# EAGLE board Enlighten-PL9823-Panel-1 (EAGLE 7.5.0)
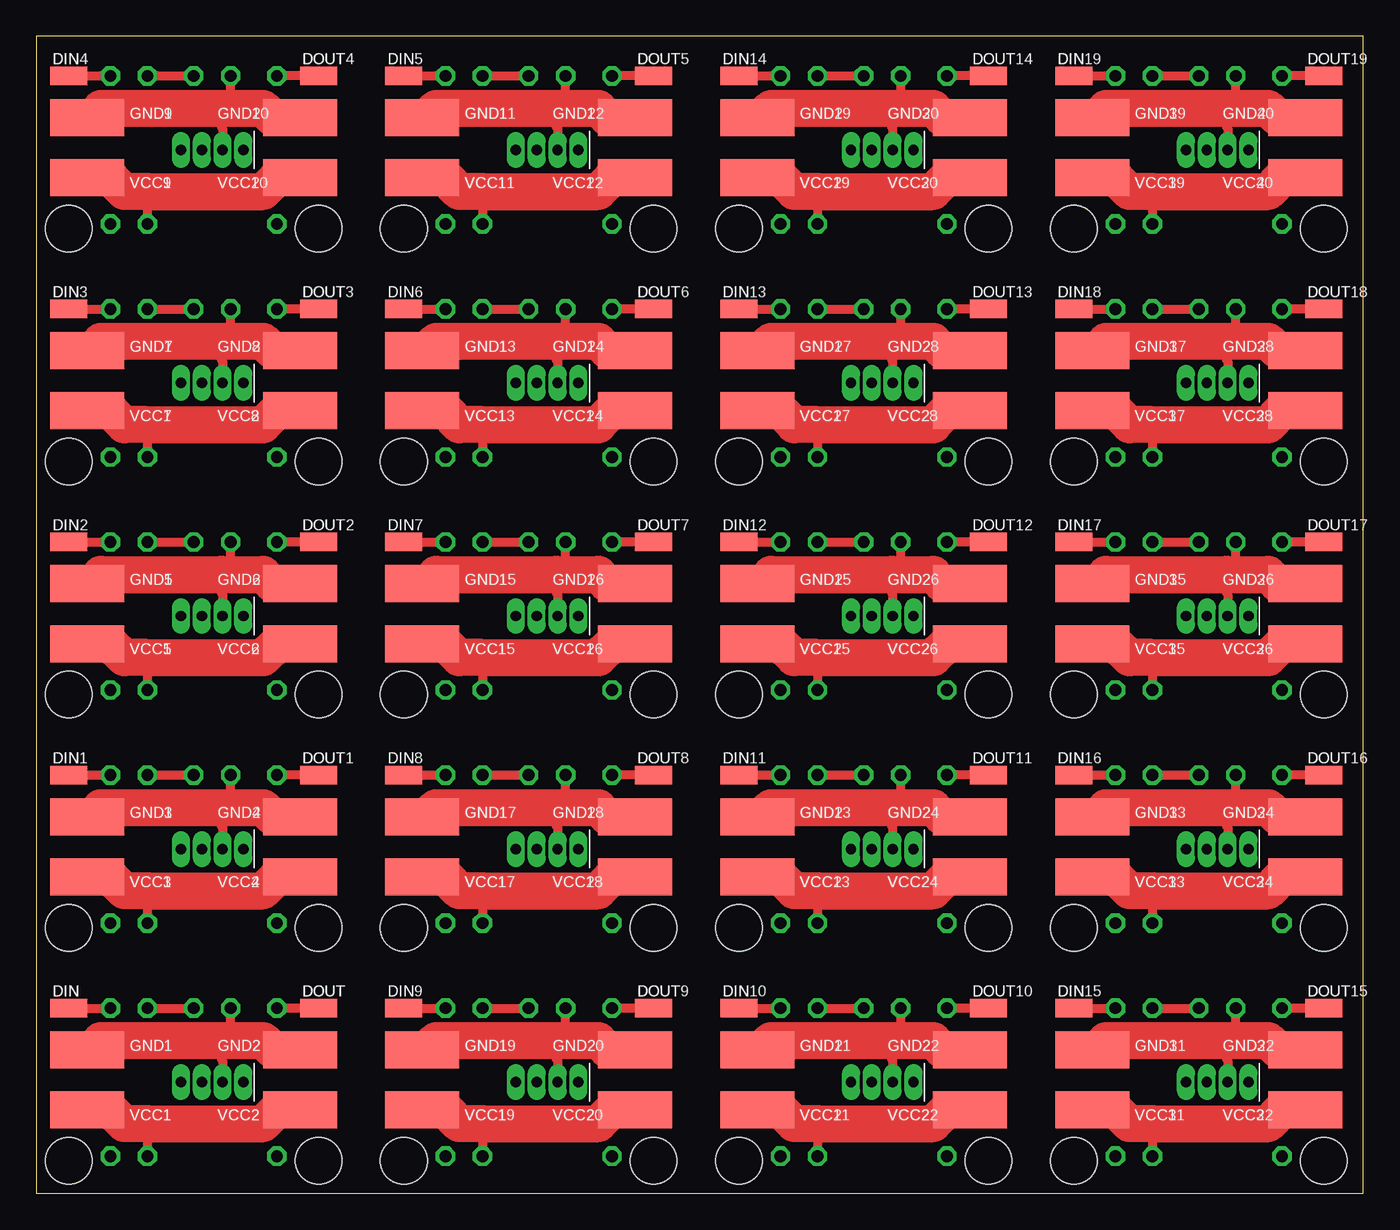
[diagram p0: board, top side]
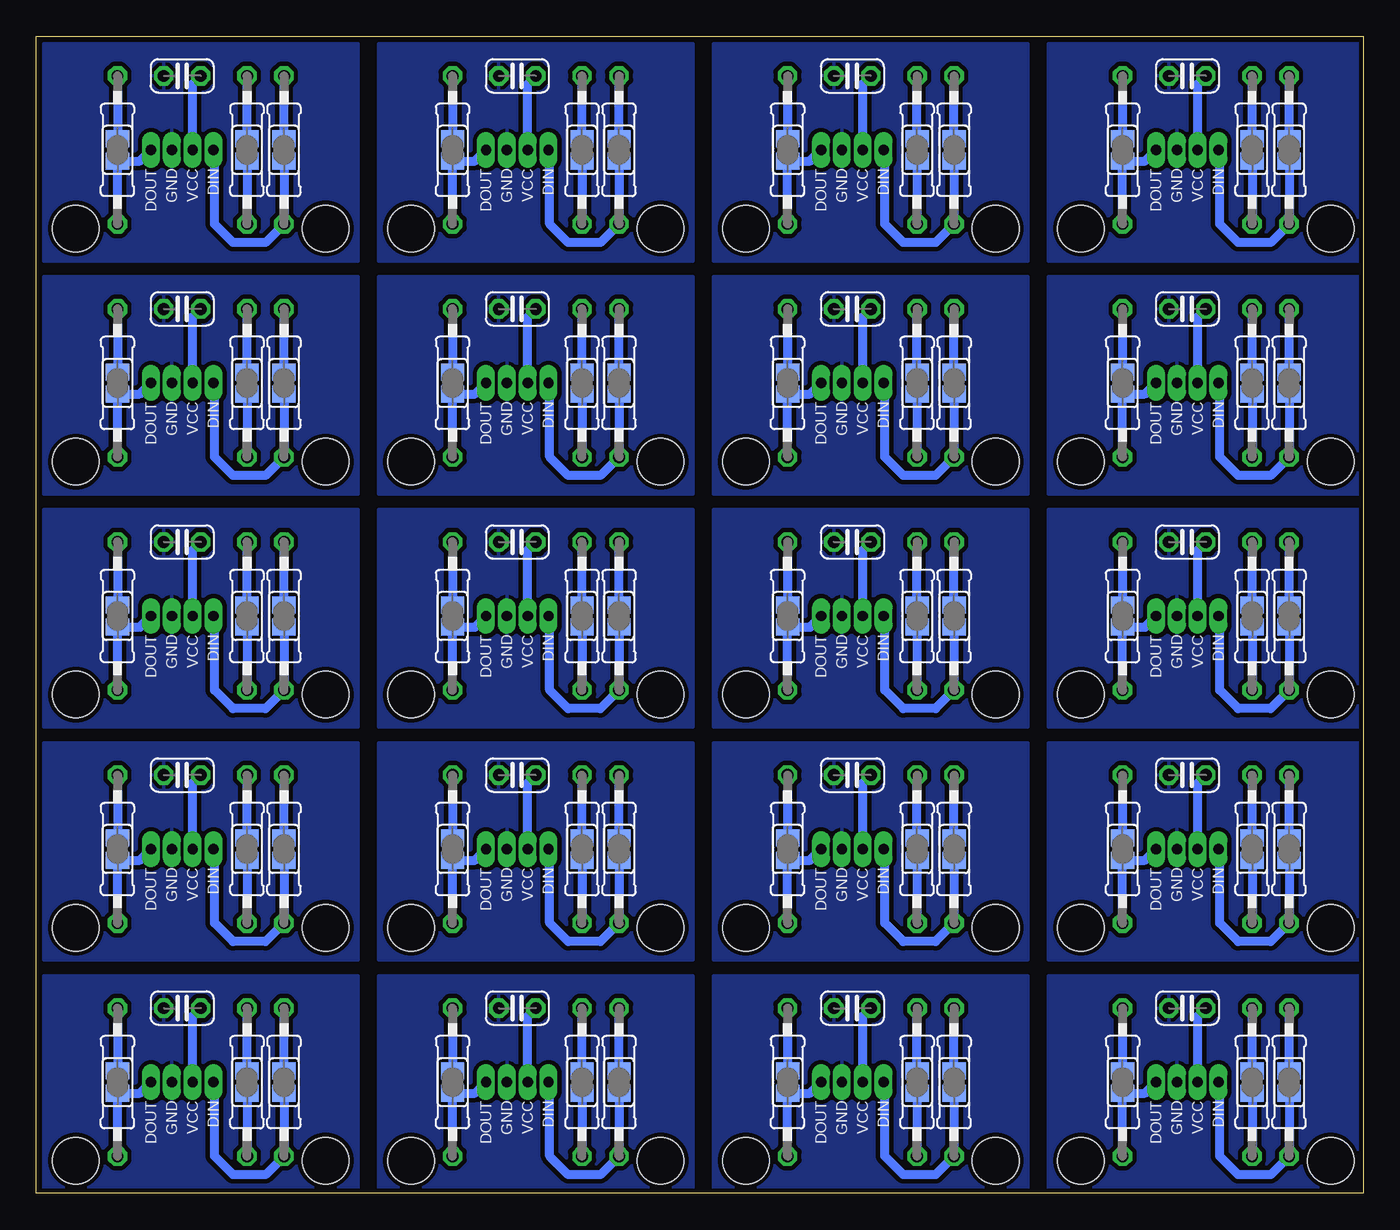
[diagram p1: board, bottom side, seen from below]

Size 91.08 x 79.41 mm. Coordinates in mm from the lower left corner, seen from the top.
Outline: 0,0 91.08,0 91.08,79.41 0,79.41 0,0
Copper layers (1*16): Top 0.035mm / dielectric 1.5mm / Bottom 0.035mm
Design rules "dirt_cheap_dirty_boards.v1": minimum track width 5mil, minimum drill 12mil, track to track 5mil, track to pad 5mil, pad to pad 5mil, via to via 5mil, smd to smd 0mil, copper to edge 10mil, drill to drill 10mil, minimum pad ring 10mil, minimum via ring 6mil, stop-mask expansion 2mil, vias tented up to drill 25mil, thermal gap 10mil
Holes 3.2 mm at 2.22,2.22 19.37,2.22 2.22,18.22 19.37,18.22 2.22,34.22 19.37,34.22 2.22,50.22 19.37,50.22 2.22,66.22 19.37,66.22 25.22,66.22 42.37,66.22 25.22,50.22 42.37,50.22 25.22,34.22 42.37,34.22 25.22,18.22 42.37,18.22 25.22,2.22 42.37,2.22 48.22,2.22 65.37,2.22 48.22,18.22 65.37,18.22 48.22,34.22 65.37,34.22 48.22,50.22 65.37,50.22 48.22,66.22 65.37,66.22 71.22,2.22 88.37,2.22 71.22,18.22 88.37,18.22 71.22,34.22 88.37,34.22 71.22,50.22 88.37,50.22 71.22,66.22 88.37,66.22

## Footprints (pad centres in the part's own frame; a part is rotated, then mirrored left to right if it is on the bottom)
C025-024X044 = drill 0.813 octagon: 1 -1.27,0; 2 1.27,0
SMD1,27-2,54 = smd 1.27 x 2.54: 1 0,0
SMD2,54-5,08 = smd 2.54 x 5.08: 1 0,0
LED-PL9823-F5W = drill 0.711 pad 0.889 long: 1 -2.143,0; 2 -0.714,0; 3 0.714,0; 4 2.143,0
0207/10 = drill 0.813 octagon: 1 -5.08,0; 2 5.08,0
SJ = smd 1.168 x 1.6: 1 -0.762,0; 2 0.762,0

## Placement (x,y rotation side)
C1  100nF  [C025-024X044]  12.06,12.7 180 bottom
C2  100nF  [C025-024X044]  12.06,28.7 180 bottom
C3  100nF  [C025-024X044]  12.06,44.7 180 bottom
C4  100nF  [C025-024X044]  12.06,60.7 180 bottom
C5  100nF  [C025-024X044]  12.06,76.7 180 bottom
C6  100nF  [C025-024X044]  35.06,76.7 180 bottom
C7  100nF  [C025-024X044]  35.06,60.7 180 bottom
C8  100nF  [C025-024X044]  35.06,44.7 180 bottom
C9  100nF  [C025-024X044]  35.06,28.7 180 bottom
C10  100nF  [C025-024X044]  35.06,12.7 180 bottom
C11  100nF  [C025-024X044]  58.06,12.7 180 bottom
C12  100nF  [C025-024X044]  58.06,28.7 180 bottom
C13  100nF  [C025-024X044]  58.06,44.7 180 bottom
C14  100nF  [C025-024X044]  58.06,60.7 180 bottom
C15  100nF  [C025-024X044]  58.06,76.7 180 bottom
C16  100nF  [C025-024X044]  81.06,12.7 180 bottom
C17  100nF  [C025-024X044]  81.06,28.7 180 bottom
C18  100nF  [C025-024X044]  81.06,44.7 180 bottom
C19  100nF  [C025-024X044]  81.06,60.7 180 bottom
C20  100nF  [C025-024X044]  81.06,76.7 180 bottom
DIN  [SMD1,27-2,54]  2.22,12.7 90 top
DIN1  [SMD1,27-2,54]  2.22,28.7 90 top
DIN2  [SMD1,27-2,54]  2.22,44.7 90 top
DIN3  [SMD1,27-2,54]  2.22,60.7 90 top
DIN4  [SMD1,27-2,54]  2.22,76.7 90 top
DIN5  [SMD1,27-2,54]  25.22,76.7 90 top
DIN6  [SMD1,27-2,54]  25.22,60.7 90 top
DIN7  [SMD1,27-2,54]  25.22,44.7 90 top
DIN8  [SMD1,27-2,54]  25.22,28.7 90 top
DIN9  [SMD1,27-2,54]  25.22,12.7 90 top
DIN10  [SMD1,27-2,54]  48.22,12.7 90 top
DIN11  [SMD1,27-2,54]  48.22,28.7 90 top
DIN12  [SMD1,27-2,54]  48.22,44.7 90 top
DIN13  [SMD1,27-2,54]  48.22,60.7 90 top
DIN14  [SMD1,27-2,54]  48.22,76.7 90 top
DIN15  [SMD1,27-2,54]  71.22,12.7 90 top
DIN16  [SMD1,27-2,54]  71.22,28.7 90 top
DIN17  [SMD1,27-2,54]  71.22,44.7 90 top
DIN18  [SMD1,27-2,54]  71.22,60.7 90 top
DIN19  [SMD1,27-2,54]  71.22,76.7 90 top
DOUT  [SMD1,27-2,54]  19.37,12.7 90 top
DOUT1  [SMD1,27-2,54]  19.37,28.7 90 top
DOUT2  [SMD1,27-2,54]  19.37,44.7 90 top
DOUT3  [SMD1,27-2,54]  19.37,60.7 90 top
DOUT4  [SMD1,27-2,54]  19.37,76.7 90 top
DOUT5  [SMD1,27-2,54]  42.37,76.7 90 top
DOUT6  [SMD1,27-2,54]  42.37,60.7 90 top
DOUT7  [SMD1,27-2,54]  42.37,44.7 90 top
DOUT8  [SMD1,27-2,54]  42.37,28.7 90 top
DOUT9  [SMD1,27-2,54]  42.37,12.7 90 top
DOUT10  [SMD1,27-2,54]  65.37,12.7 90 top
DOUT11  [SMD1,27-2,54]  65.37,28.7 90 top
DOUT12  [SMD1,27-2,54]  65.37,44.7 90 top
DOUT13  [SMD1,27-2,54]  65.37,60.7 90 top
DOUT14  [SMD1,27-2,54]  65.37,76.7 90 top
DOUT15  [SMD1,27-2,54]  88.37,12.7 90 top
DOUT16  [SMD1,27-2,54]  88.37,28.7 90 top
DOUT17  [SMD1,27-2,54]  88.37,44.7 90 top
DOUT18  [SMD1,27-2,54]  88.37,60.7 90 top
DOUT19  [SMD1,27-2,54]  88.37,76.7 90 top
GND1  [SMD2,54-5,08]  3.49,9.84 90 top
GND2  [SMD2,54-5,08]  18.1,9.84 90 top
GND3  [SMD2,54-5,08]  3.49,25.84 90 top
GND4  [SMD2,54-5,08]  18.1,25.84 90 top
GND5  [SMD2,54-5,08]  3.49,41.84 90 top
GND6  [SMD2,54-5,08]  18.1,41.84 90 top
GND7  [SMD2,54-5,08]  3.49,57.84 90 top
GND8  [SMD2,54-5,08]  18.1,57.84 90 top
GND9  [SMD2,54-5,08]  3.49,73.84 90 top
GND10  [SMD2,54-5,08]  18.1,73.84 90 top
GND11  [SMD2,54-5,08]  26.49,73.84 90 top
GND12  [SMD2,54-5,08]  41.1,73.84 90 top
GND13  [SMD2,54-5,08]  26.49,57.84 90 top
GND14  [SMD2,54-5,08]  41.1,57.84 90 top
GND15  [SMD2,54-5,08]  26.49,41.84 90 top
GND16  [SMD2,54-5,08]  41.1,41.84 90 top
GND17  [SMD2,54-5,08]  26.49,25.84 90 top
GND18  [SMD2,54-5,08]  41.1,25.84 90 top
GND19  [SMD2,54-5,08]  26.49,9.84 90 top
GND20  [SMD2,54-5,08]  41.1,9.84 90 top
GND21  [SMD2,54-5,08]  49.49,9.84 90 top
GND22  [SMD2,54-5,08]  64.1,9.84 90 top
GND23  [SMD2,54-5,08]  49.49,25.84 90 top
GND24  [SMD2,54-5,08]  64.1,25.84 90 top
GND25  [SMD2,54-5,08]  49.49,41.84 90 top
GND26  [SMD2,54-5,08]  64.1,41.84 90 top
GND27  [SMD2,54-5,08]  49.49,57.84 90 top
GND28  [SMD2,54-5,08]  64.1,57.84 90 top
GND29  [SMD2,54-5,08]  49.49,73.84 90 top
GND30  [SMD2,54-5,08]  64.1,73.84 90 top
GND31  [SMD2,54-5,08]  72.49,9.84 90 top
GND32  [SMD2,54-5,08]  87.1,9.84 90 top
GND33  [SMD2,54-5,08]  72.49,25.84 90 top
GND34  [SMD2,54-5,08]  87.1,25.84 90 top
GND35  [SMD2,54-5,08]  72.49,41.84 90 top
GND36  [SMD2,54-5,08]  87.1,41.84 90 top
GND37  [SMD2,54-5,08]  72.49,57.84 90 top
GND38  [SMD2,54-5,08]  87.1,57.84 90 top
GND39  [SMD2,54-5,08]  72.49,73.84 90 top
GND40  [SMD2,54-5,08]  87.1,73.84 90 top
PLC1  LED-PL9823-F5W  [LED-PL9823-F5W]  12.06,23.62 0 top
PLC2  LED-PL9823-F5W  [LED-PL9823-F5W]  12.06,39.62 0 top
PLC3  LED-PL9823-F5W  [LED-PL9823-F5W]  12.06,55.62 0 top
PLC4  LED-PL9823-F5W  [LED-PL9823-F5W]  12.06,71.62 0 top
PLC5  LED-PL9823-F5W  [LED-PL9823-F5W]  35.06,71.62 0 top
PLC6  LED-PL9823-F5W  [LED-PL9823-F5W]  35.06,55.62 0 top
PLC7  LED-PL9823-F5W  [LED-PL9823-F5W]  35.06,39.62 0 top
PLC8  LED-PL9823-F5W  [LED-PL9823-F5W]  35.06,23.62 0 top
PLC9  LED-PL9823-F5W  [LED-PL9823-F5W]  35.06,7.62 0 top
PLC10  LED-PL9823-F5W  [LED-PL9823-F5W]  58.06,7.62 0 top
PLC11  LED-PL9823-F5W  [LED-PL9823-F5W]  58.06,23.62 0 top
PLC12  LED-PL9823-F5W  [LED-PL9823-F5W]  58.06,39.62 0 top
PLC13  LED-PL9823-F5W  [LED-PL9823-F5W]  58.06,55.62 0 top
PLC14  LED-PL9823-F5W  [LED-PL9823-F5W]  58.06,71.62 0 top
PLC15  LED-PL9823-F5W  [LED-PL9823-F5W]  81.06,7.62 0 top
PLC16  LED-PL9823-F5W  [LED-PL9823-F5W]  81.06,23.62 0 top
PLC17  LED-PL9823-F5W  [LED-PL9823-F5W]  81.06,39.62 0 top
PLC18  LED-PL9823-F5W  [LED-PL9823-F5W]  81.06,55.62 0 top
PLC19  LED-PL9823-F5W  [LED-PL9823-F5W]  81.06,71.62 0 top
PLC9823  LED-PL9823-F5W  [LED-PL9823-F5W]  12.06,7.62 0 top
R1  33R  [0207/10]  5.08,7.62 90 bottom
R2  33R  [0207/10]  16.51,7.62 90 bottom
R3  150R  [0207/10]  7.62,7.62 90 bottom
R4  33R  [0207/10]  5.08,23.62 90 bottom
R5  33R  [0207/10]  16.51,23.62 90 bottom
R6  150R  [0207/10]  7.62,23.62 90 bottom
R7  33R  [0207/10]  5.08,39.62 90 bottom
R8  33R  [0207/10]  16.51,39.62 90 bottom
R9  150R  [0207/10]  7.62,39.62 90 bottom
R10  33R  [0207/10]  5.08,55.62 90 bottom
R11  33R  [0207/10]  16.51,55.62 90 bottom
R12  150R  [0207/10]  7.62,55.62 90 bottom
R13  33R  [0207/10]  5.08,71.62 90 bottom
R14  33R  [0207/10]  16.51,71.62 90 bottom
R15  150R  [0207/10]  7.62,71.62 90 bottom
R16  33R  [0207/10]  28.08,71.62 90 bottom
R17  33R  [0207/10]  39.51,71.62 90 bottom
R18  150R  [0207/10]  30.62,71.62 90 bottom
R19  33R  [0207/10]  28.08,55.62 90 bottom
R20  33R  [0207/10]  39.51,55.62 90 bottom
R21  150R  [0207/10]  30.62,55.62 90 bottom
R22  33R  [0207/10]  28.08,39.62 90 bottom
R23  33R  [0207/10]  39.51,39.62 90 bottom
R24  150R  [0207/10]  30.62,39.62 90 bottom
R25  33R  [0207/10]  28.08,23.62 90 bottom
R26  33R  [0207/10]  39.51,23.62 90 bottom
R27  150R  [0207/10]  30.62,23.62 90 bottom
R28  33R  [0207/10]  28.08,7.62 90 bottom
R29  33R  [0207/10]  39.51,7.62 90 bottom
R30  150R  [0207/10]  30.62,7.62 90 bottom
R31  33R  [0207/10]  51.08,7.62 90 bottom
R32  33R  [0207/10]  62.51,7.62 90 bottom
R33  150R  [0207/10]  53.62,7.62 90 bottom
R34  33R  [0207/10]  51.08,23.62 90 bottom
R35  33R  [0207/10]  62.51,23.62 90 bottom
R36  150R  [0207/10]  53.62,23.62 90 bottom
R37  33R  [0207/10]  51.08,39.62 90 bottom
R38  33R  [0207/10]  62.51,39.62 90 bottom
R39  150R  [0207/10]  53.62,39.62 90 bottom
R40  33R  [0207/10]  51.08,55.62 90 bottom
R41  33R  [0207/10]  62.51,55.62 90 bottom
R42  150R  [0207/10]  53.62,55.62 90 bottom
R43  33R  [0207/10]  51.08,71.62 90 bottom
R44  33R  [0207/10]  62.51,71.62 90 bottom
R45  150R  [0207/10]  53.62,71.62 90 bottom
R46  33R  [0207/10]  74.08,7.62 90 bottom
R47  33R  [0207/10]  85.51,7.62 90 bottom
R48  150R  [0207/10]  76.62,7.62 90 bottom
R49  33R  [0207/10]  74.08,23.62 90 bottom
R50  33R  [0207/10]  85.51,23.62 90 bottom
R51  150R  [0207/10]  76.62,23.62 90 bottom
R52  33R  [0207/10]  74.08,39.62 90 bottom
R53  33R  [0207/10]  85.51,39.62 90 bottom
R54  150R  [0207/10]  76.62,39.62 90 bottom
R55  33R  [0207/10]  74.08,55.62 90 bottom
R56  33R  [0207/10]  85.51,55.62 90 bottom
R57  150R  [0207/10]  76.62,55.62 90 bottom
R58  33R  [0207/10]  74.08,71.62 90 bottom
R59  33R  [0207/10]  85.51,71.62 90 bottom
R60  150R  [0207/10]  76.62,71.62 90 bottom
SJ1  [SJ]  5.08,7.62 90 bottom
SJ2  [SJ]  16.51,7.62 90 bottom
SJ3  [SJ]  7.62,7.62 90 bottom
SJ4  [SJ]  5.08,23.62 90 bottom
SJ5  [SJ]  16.51,23.62 90 bottom
SJ6  [SJ]  7.62,23.62 90 bottom
SJ7  [SJ]  5.08,39.62 90 bottom
SJ8  [SJ]  16.51,39.62 90 bottom
SJ9  [SJ]  7.62,39.62 90 bottom
SJ10  [SJ]  5.08,55.62 90 bottom
SJ11  [SJ]  16.51,55.62 90 bottom
SJ12  [SJ]  7.62,55.62 90 bottom
SJ13  [SJ]  5.08,71.62 90 bottom
SJ14  [SJ]  16.51,71.62 90 bottom
SJ15  [SJ]  7.62,71.62 90 bottom
SJ16  [SJ]  28.08,71.62 90 bottom
SJ17  [SJ]  39.51,71.62 90 bottom
SJ18  [SJ]  30.62,71.62 90 bottom
SJ19  [SJ]  28.08,55.62 90 bottom
SJ20  [SJ]  39.51,55.62 90 bottom
SJ21  [SJ]  30.62,55.62 90 bottom
SJ22  [SJ]  28.08,39.62 90 bottom
SJ23  [SJ]  39.51,39.62 90 bottom
SJ24  [SJ]  30.62,39.62 90 bottom
SJ25  [SJ]  28.08,23.62 90 bottom
SJ26  [SJ]  39.51,23.62 90 bottom
SJ27  [SJ]  30.62,23.62 90 bottom
SJ28  [SJ]  28.08,7.62 90 bottom
SJ29  [SJ]  39.51,7.62 90 bottom
SJ30  [SJ]  30.62,7.62 90 bottom
SJ31  [SJ]  51.08,7.62 90 bottom
SJ32  [SJ]  62.51,7.62 90 bottom
SJ33  [SJ]  53.62,7.62 90 bottom
SJ34  [SJ]  51.08,23.62 90 bottom
SJ35  [SJ]  62.51,23.62 90 bottom
SJ36  [SJ]  53.62,23.62 90 bottom
SJ37  [SJ]  51.08,39.62 90 bottom
SJ38  [SJ]  62.51,39.62 90 bottom
SJ39  [SJ]  53.62,39.62 90 bottom
SJ40  [SJ]  51.08,55.62 90 bottom
SJ41  [SJ]  62.51,55.62 90 bottom
SJ42  [SJ]  53.62,55.62 90 bottom
SJ43  [SJ]  51.08,71.62 90 bottom
SJ44  [SJ]  62.51,71.62 90 bottom
SJ45  [SJ]  53.62,71.62 90 bottom
SJ46  [SJ]  74.08,7.62 90 bottom
SJ47  [SJ]  85.51,7.62 90 bottom
SJ48  [SJ]  76.62,7.62 90 bottom
SJ49  [SJ]  74.08,23.62 90 bottom
SJ50  [SJ]  85.51,23.62 90 bottom
SJ51  [SJ]  76.62,23.62 90 bottom
SJ52  [SJ]  74.08,39.62 90 bottom
SJ53  [SJ]  85.51,39.62 90 bottom
SJ54  [SJ]  76.62,39.62 90 bottom
SJ55  [SJ]  74.08,55.62 90 bottom
SJ56  [SJ]  85.51,55.62 90 bottom
SJ57  [SJ]  76.62,55.62 90 bottom
SJ58  [SJ]  74.08,71.62 90 bottom
SJ59  [SJ]  85.51,71.62 90 bottom
SJ60  [SJ]  76.62,71.62 90 bottom
VCC1  [SMD2,54-5,08]  3.49,5.71 90 top
VCC2  [SMD2,54-5,08]  18.1,5.71 90 top
VCC3  [SMD2,54-5,08]  3.49,21.71 90 top
VCC4  [SMD2,54-5,08]  18.1,21.71 90 top
VCC5  [SMD2,54-5,08]  3.49,37.72 90 top
VCC6  [SMD2,54-5,08]  18.1,37.72 90 top
VCC7  [SMD2,54-5,08]  3.49,53.72 90 top
VCC8  [SMD2,54-5,08]  18.1,53.72 90 top
VCC9  [SMD2,54-5,08]  3.49,69.72 90 top
VCC10  [SMD2,54-5,08]  18.1,69.72 90 top
VCC11  [SMD2,54-5,08]  26.49,69.72 90 top
VCC12  [SMD2,54-5,08]  41.1,69.72 90 top
VCC13  [SMD2,54-5,08]  26.49,53.72 90 top
VCC14  [SMD2,54-5,08]  41.1,53.72 90 top
VCC15  [SMD2,54-5,08]  26.49,37.72 90 top
VCC16  [SMD2,54-5,08]  41.1,37.72 90 top
VCC17  [SMD2,54-5,08]  26.49,21.71 90 top
VCC18  [SMD2,54-5,08]  41.1,21.71 90 top
VCC19  [SMD2,54-5,08]  26.49,5.71 90 top
VCC20  [SMD2,54-5,08]  41.1,5.71 90 top
VCC21  [SMD2,54-5,08]  49.49,5.71 90 top
VCC22  [SMD2,54-5,08]  64.1,5.71 90 top
VCC23  [SMD2,54-5,08]  49.49,21.71 90 top
VCC24  [SMD2,54-5,08]  64.1,21.71 90 top
VCC25  [SMD2,54-5,08]  49.49,37.72 90 top
VCC26  [SMD2,54-5,08]  64.1,37.72 90 top
VCC27  [SMD2,54-5,08]  49.49,53.72 90 top
VCC28  [SMD2,54-5,08]  64.1,53.72 90 top
VCC29  [SMD2,54-5,08]  49.49,69.72 90 top
VCC30  [SMD2,54-5,08]  64.1,69.72 90 top
VCC31  [SMD2,54-5,08]  72.49,5.71 90 top
VCC32  [SMD2,54-5,08]  87.1,5.71 90 top
VCC33  [SMD2,54-5,08]  72.49,21.71 90 top
VCC34  [SMD2,54-5,08]  87.1,21.71 90 top
VCC35  [SMD2,54-5,08]  72.49,37.72 90 top
VCC36  [SMD2,54-5,08]  87.1,37.72 90 top
VCC37  [SMD2,54-5,08]  72.49,53.72 90 top
VCC38  [SMD2,54-5,08]  87.1,53.72 90 top
VCC39  [SMD2,54-5,08]  72.49,69.72 90 top
VCC40  [SMD2,54-5,08]  87.1,69.72 90 top

## Library data of the parts
C1-C20 R1-R60 = rcl
DIN DIN1-DIN19 DOUT DOUT1-DOUT19 GND1-GND40 PLC1-PLC19 PLC9823 SJ1-SJ60 VCC1-VCC40 = Enlighten

## Nets
GND: C1.2 GND1.1 GND2.1 PLC9823.3
GND1: C2.2 GND3.1 GND4.1 PLC1.3
GND2: C3.2 GND5.1 GND6.1 PLC2.3
GND3: C4.2 GND7.1 GND8.1 PLC3.3
GND4: C5.2 GND9.1 GND10.1 PLC4.3
GND5: C6.2 GND11.1 GND12.1 PLC5.3
GND6: C7.2 GND13.1 GND14.1 PLC6.3
GND7: C8.2 GND15.1 GND16.1 PLC7.3
GND8: C9.2 GND17.1 GND18.1 PLC8.3
GND9: C10.2 GND19.1 GND20.1 PLC9.3
GND10: C11.2 GND21.1 GND22.1 PLC10.3
GND11: C12.2 GND23.1 GND24.1 PLC11.3
GND12: C13.2 GND25.1 GND26.1 PLC12.3
GND13: C14.2 GND27.1 GND28.1 PLC13.3
GND14: C15.2 GND29.1 GND30.1 PLC14.3
GND15: C16.2 GND31.1 GND32.1 PLC15.3
GND16: C17.2 GND33.1 GND34.1 PLC16.3
GND17: C18.2 GND35.1 GND36.1 PLC17.3
GND18: C19.2 GND37.1 GND38.1 PLC18.3
GND19: C20.2 GND39.1 GND40.1 PLC19.3
N$1: PLC9823.1 R1.1 SJ1.1
N$2: PLC9823.4 R2.1 SJ2.1
N$3: DIN.1 R1.2 SJ1.2
N$4: DOUT.1 R2.2 SJ2.2
N$5: C1.1 PLC9823.2 R3.2 SJ3.2
N$6: PLC1.1 R4.1 SJ4.1
N$7: PLC1.4 R5.1 SJ5.1
N$8: DIN1.1 R4.2 SJ4.2
N$9: DOUT1.1 R5.2 SJ5.2
N$10: C2.1 PLC1.2 R6.2 SJ6.2
N$11: PLC2.1 R7.1 SJ7.1
N$12: PLC2.4 R8.1 SJ8.1
N$13: DIN2.1 R7.2 SJ7.2
N$14: DOUT2.1 R8.2 SJ8.2
N$15: C3.1 PLC2.2 R9.2 SJ9.2
N$16: PLC3.1 R10.1 SJ10.1
N$17: PLC3.4 R11.1 SJ11.1
N$18: DIN3.1 R10.2 SJ10.2
N$19: DOUT3.1 R11.2 SJ11.2
N$20: C4.1 PLC3.2 R12.2 SJ12.2
N$21: PLC4.1 R13.1 SJ13.1
N$22: PLC4.4 R14.1 SJ14.1
N$23: DIN4.1 R13.2 SJ13.2
N$24: DOUT4.1 R14.2 SJ14.2
N$25: C5.1 PLC4.2 R15.2 SJ15.2
N$26: PLC5.1 R16.1 SJ16.1
N$27: PLC5.4 R17.1 SJ17.1
N$28: DIN5.1 R16.2 SJ16.2
N$29: DOUT5.1 R17.2 SJ17.2
N$30: C6.1 PLC5.2 R18.2 SJ18.2
N$31: PLC6.1 R19.1 SJ19.1
N$32: PLC6.4 R20.1 SJ20.1
N$33: DIN6.1 R19.2 SJ19.2
N$34: DOUT6.1 R20.2 SJ20.2
N$35: C7.1 PLC6.2 R21.2 SJ21.2
N$36: PLC7.1 R22.1 SJ22.1
N$37: PLC7.4 R23.1 SJ23.1
N$38: DIN7.1 R22.2 SJ22.2
N$39: DOUT7.1 R23.2 SJ23.2
N$40: C8.1 PLC7.2 R24.2 SJ24.2
N$41: PLC8.1 R25.1 SJ25.1
N$42: PLC8.4 R26.1 SJ26.1
N$43: DIN8.1 R25.2 SJ25.2
N$44: DOUT8.1 R26.2 SJ26.2
N$45: C9.1 PLC8.2 R27.2 SJ27.2
N$46: PLC9.1 R28.1 SJ28.1
N$47: PLC9.4 R29.1 SJ29.1
N$48: DIN9.1 R28.2 SJ28.2
N$49: DOUT9.1 R29.2 SJ29.2
N$50: C10.1 PLC9.2 R30.2 SJ30.2
N$51: PLC10.1 R31.1 SJ31.1
N$52: PLC10.4 R32.1 SJ32.1
N$53: DIN10.1 R31.2 SJ31.2
N$54: DOUT10.1 R32.2 SJ32.2
N$55: C11.1 PLC10.2 R33.2 SJ33.2
N$56: PLC11.1 R34.1 SJ34.1
N$57: PLC11.4 R35.1 SJ35.1
N$58: DIN11.1 R34.2 SJ34.2
N$59: DOUT11.1 R35.2 SJ35.2
N$60: C12.1 PLC11.2 R36.2 SJ36.2
N$61: PLC12.1 R37.1 SJ37.1
N$62: PLC12.4 R38.1 SJ38.1
N$63: DIN12.1 R37.2 SJ37.2
N$64: DOUT12.1 R38.2 SJ38.2
N$65: C13.1 PLC12.2 R39.2 SJ39.2
N$66: PLC13.1 R40.1 SJ40.1
N$67: PLC13.4 R41.1 SJ41.1
N$68: DIN13.1 R40.2 SJ40.2
N$69: DOUT13.1 R41.2 SJ41.2
N$70: C14.1 PLC13.2 R42.2 SJ42.2
N$71: PLC14.1 R43.1 SJ43.1
N$72: PLC14.4 R44.1 SJ44.1
N$73: DIN14.1 R43.2 SJ43.2
N$74: DOUT14.1 R44.2 SJ44.2
N$75: C15.1 PLC14.2 R45.2 SJ45.2
N$76: PLC15.1 R46.1 SJ46.1
N$77: PLC15.4 R47.1 SJ47.1
N$78: DIN15.1 R46.2 SJ46.2
N$79: DOUT15.1 R47.2 SJ47.2
N$80: C16.1 PLC15.2 R48.2 SJ48.2
N$81: PLC16.1 R49.1 SJ49.1
N$82: PLC16.4 R50.1 SJ50.1
N$83: DIN16.1 R49.2 SJ49.2
N$84: DOUT16.1 R50.2 SJ50.2
N$85: C17.1 PLC16.2 R51.2 SJ51.2
N$86: PLC17.1 R52.1 SJ52.1
N$87: PLC17.4 R53.1 SJ53.1
N$88: DIN17.1 R52.2 SJ52.2
N$89: DOUT17.1 R53.2 SJ53.2
N$90: C18.1 PLC17.2 R54.2 SJ54.2
N$91: PLC18.1 R55.1 SJ55.1
N$92: PLC18.4 R56.1 SJ56.1
N$93: DIN18.1 R55.2 SJ55.2
N$94: DOUT18.1 R56.2 SJ56.2
N$95: C19.1 PLC18.2 R57.2 SJ57.2
N$96: PLC19.1 R58.1 SJ58.1
N$97: PLC19.4 R59.1 SJ59.1
N$98: DIN19.1 R58.2 SJ58.2
N$99: DOUT19.1 R59.2 SJ59.2
N$100: C20.1 PLC19.2 R60.2 SJ60.2
VCC: R3.1 SJ3.1 VCC1.1 VCC2.1
VCC1: R6.1 SJ6.1 VCC3.1 VCC4.1
VCC2: R9.1 SJ9.1 VCC5.1 VCC6.1
VCC3: R12.1 SJ12.1 VCC7.1 VCC8.1
VCC4: R15.1 SJ15.1 VCC9.1 VCC10.1
VCC5: R18.1 SJ18.1 VCC11.1 VCC12.1
VCC6: R21.1 SJ21.1 VCC13.1 VCC14.1
VCC7: R24.1 SJ24.1 VCC15.1 VCC16.1
VCC8: R27.1 SJ27.1 VCC17.1 VCC18.1
VCC9: R30.1 SJ30.1 VCC19.1 VCC20.1
VCC10: R33.1 SJ33.1 VCC21.1 VCC22.1
VCC11: R36.1 SJ36.1 VCC23.1 VCC24.1
VCC12: R39.1 SJ39.1 VCC25.1 VCC26.1
VCC13: R42.1 SJ42.1 VCC27.1 VCC28.1
VCC14: R45.1 SJ45.1 VCC29.1 VCC30.1
VCC15: R48.1 SJ48.1 VCC31.1 VCC32.1
VCC16: R51.1 SJ51.1 VCC33.1 VCC34.1
VCC17: R54.1 SJ54.1 VCC35.1 VCC36.1
VCC18: R57.1 SJ57.1 VCC37.1 VCC38.1
VCC19: R60.1 SJ60.1 VCC39.1 VCC40.1

## Tracks (layer width: path | path; a pad name or v marks a point on that pad's centre or on a via)
GND
  Top 0.61: 13.34,10.48 C1.2 | 12.7,10.48 12.7,9.21 12.78,9.13 PLC9823.3
  Top 2.54: GND1.1 3.81,9.84 4.45,10.48 12.7,10.48 13.34,10.48 15.56,10.48 16.19,9.84 GND2.1
  pour Bottom (isolate 0.305): 0,0 0,14.92 21.59,14.92 21.59,0
GND1
  Top 0.61: 13.34,26.48 C2.2 | 12.7,26.48 12.7,25.21 12.78,25.13 PLC1.3
  Top 2.54: GND3.1 3.81,25.84 4.45,26.48 12.7,26.48 13.34,26.48 15.56,26.48 16.19,25.84 GND4.1
  pour Bottom (isolate 0.305): 0,16 0,30.92 21.59,30.92 21.59,16
GND2
  Top 0.61: 13.34,42.48 C3.2 | 12.7,42.48 12.7,41.21 12.78,41.13 PLC2.3
  Top 2.54: GND5.1 3.81,41.84 4.45,42.48 12.7,42.48 13.34,42.48 15.56,42.48 16.19,41.84 GND6.1
  pour Bottom (isolate 0.305): 0,32 0,46.92 21.59,46.92 21.59,32
GND3
  Top 0.61: 13.34,58.48 C4.2 | 12.7,58.48 12.7,57.21 12.78,57.13 PLC3.3
  Top 2.54: GND7.1 3.81,57.84 4.45,58.48 12.7,58.48 13.34,58.48 15.56,58.48 16.19,57.84 GND8.1
  pour Bottom (isolate 0.305): 0,48 0,62.92 21.59,62.92 21.59,48
GND4
  Top 0.61: 13.34,74.48 C5.2 | 12.7,74.48 12.7,73.21 12.78,73.13 PLC4.3
  Top 2.54: GND9.1 3.81,73.84 4.45,74.48 12.7,74.48 13.34,74.48 15.56,74.48 16.19,73.84 GND10.1
  pour Bottom (isolate 0.305): 0,64 0,78.92 21.59,78.92 21.59,64
GND5
  Top 0.61: 36.34,74.48 C6.2 | 35.7,74.48 35.7,73.21 35.78,73.13 PLC5.3
  Top 2.54: GND11.1 26.81,73.84 27.45,74.48 35.7,74.48 36.34,74.48 38.56,74.48 39.19,73.84 GND12.1
  pour Bottom (isolate 0.305): 23,64 23,78.92 44.59,78.92 44.59,64
GND6
  Top 0.61: 36.34,58.48 C7.2 | 35.7,58.48 35.7,57.21 35.78,57.13 PLC6.3
  Top 2.54: GND13.1 26.81,57.84 27.45,58.48 35.7,58.48 36.34,58.48 38.56,58.48 39.19,57.84 GND14.1
  pour Bottom (isolate 0.305): 23,48 23,62.92 44.59,62.92 44.59,48
GND7
  Top 0.61: 36.34,42.48 C8.2 | 35.7,42.48 35.7,41.21 35.78,41.13 PLC7.3
  Top 2.54: GND15.1 26.81,41.84 27.45,42.48 35.7,42.48 36.34,42.48 38.56,42.48 39.19,41.84 GND16.1
  pour Bottom (isolate 0.305): 23,32 23,46.92 44.59,46.92 44.59,32
GND8
  Top 0.61: 36.34,26.48 C9.2 | 35.7,26.48 35.7,25.21 35.78,25.13 PLC8.3
  Top 2.54: GND17.1 26.81,25.84 27.45,26.48 35.7,26.48 36.34,26.48 38.56,26.48 39.19,25.84 GND18.1
  pour Bottom (isolate 0.305): 23,16 23,30.92 44.59,30.92 44.59,16
GND9
  Top 0.61: 36.34,10.48 C10.2 | 35.7,10.48 35.7,9.21 35.78,9.13 PLC9.3
  Top 2.54: GND19.1 26.81,9.84 27.45,10.48 35.7,10.48 36.34,10.48 38.56,10.48 39.19,9.84 GND20.1
  pour Bottom (isolate 0.305): 23,0 23,14.92 44.59,14.92 44.59,0
GND10
  Top 0.61: 59.34,10.48 C11.2 | 58.7,10.48 58.7,9.21 58.78,9.13 PLC10.3
  Top 2.54: GND21.1 49.81,9.84 50.45,10.48 58.7,10.48 59.34,10.48 61.56,10.48 62.19,9.84 GND22.1
  pour Bottom (isolate 0.305): 46,0 46,14.92 67.59,14.92 67.59,0
GND11
  Top 0.61: 59.34,26.48 C12.2 | 58.7,26.48 58.7,25.21 58.78,25.13 PLC11.3
  Top 2.54: GND23.1 49.81,25.84 50.45,26.48 58.7,26.48 59.34,26.48 61.56,26.48 62.19,25.84 GND24.1
  pour Bottom (isolate 0.305): 46,16 46,30.92 67.59,30.92 67.59,16
GND12
  Top 0.61: 59.34,42.48 C13.2 | 58.7,42.48 58.7,41.21 58.78,41.13 PLC12.3
  Top 2.54: GND25.1 49.81,41.84 50.45,42.48 58.7,42.48 59.34,42.48 61.56,42.48 62.19,41.84 GND26.1
  pour Bottom (isolate 0.305): 46,32 46,46.92 67.59,46.92 67.59,32
GND13
  Top 0.61: 59.34,58.48 C14.2 | 58.7,58.48 58.7,57.21 58.78,57.13 PLC13.3
  Top 2.54: GND27.1 49.81,57.84 50.45,58.48 58.7,58.48 59.34,58.48 61.56,58.48 62.19,57.84 GND28.1
  pour Bottom (isolate 0.305): 46,48 46,62.92 67.59,62.92 67.59,48
GND14
  Top 0.61: 59.34,74.48 C15.2 | 58.7,74.48 58.7,73.21 58.78,73.13 PLC14.3
  Top 2.54: GND29.1 49.81,73.84 50.45,74.48 58.7,74.48 59.34,74.48 61.56,74.48 62.19,73.84 GND30.1
  pour Bottom (isolate 0.305): 46,64 46,78.92 67.59,78.92 67.59,64
GND15
  Top 0.61: 82.33,10.48 C16.2 | 81.7,10.48 81.7,9.21 81.78,9.13 PLC15.3
  Top 2.54: GND31.1 72.81,9.84 73.44,10.48 81.7,10.48 82.33,10.48 84.56,10.48 85.19,9.84 GND32.1
  pour Bottom (isolate 0.305): 69,0 69,14.92 90.59,14.92 90.59,0
GND16
  Top 0.61: 82.33,26.48 C17.2 | 81.7,26.48 81.7,25.21 81.78,25.13 PLC16.3
  Top 2.54: GND33.1 72.81,25.84 73.44,26.48 81.7,26.48 82.33,26.48 84.56,26.48 85.19,25.84 GND34.1
  pour Bottom (isolate 0.305): 69,16 69,30.92 90.59,30.92 90.59,16
GND17
  Top 0.61: 82.33,42.48 C18.2 | 81.7,42.48 81.7,41.21 81.78,41.13 PLC17.3
  Top 2.54: GND35.1 72.81,41.84 73.44,42.48 81.7,42.48 82.33,42.48 84.56,42.48 85.19,41.84 GND36.1
  pour Bottom (isolate 0.305): 69,32 69,46.92 90.59,46.92 90.59,32
GND18
  Top 0.61: 82.33,58.48 C19.2 | 81.7,58.48 81.7,57.21 81.78,57.13 PLC18.3
  Top 2.54: GND37.1 72.81,57.84 73.44,58.48 81.7,58.48 82.33,58.48 84.56,58.48 85.19,57.84 GND38.1
  pour Bottom (isolate 0.305): 69,48 69,62.92 90.59,62.92 90.59,48
GND19
  Top 0.61: 82.33,74.48 C20.2 | 81.7,74.48 81.7,73.21 81.78,73.13 PLC19.3
  Top 2.54: GND39.1 72.81,73.84 73.44,74.48 81.7,74.48 82.33,74.48 84.56,74.48 85.19,73.84 GND40.1
  pour Bottom (isolate 0.305): 69,64 69,78.92 90.59,78.92 90.59,64
N$1
  Bottom 0.61: SJ1.1 R1.1 6.35,1.27 8.57,1.27 9.84,2.54 9.84,7.54 PLC9823.1
N$2
  Bottom 0.61: R2.1 SJ2.1 14.97,6.86 PLC9823.4
N$3
  Top 0.61: DIN.1 R1.2
  Bottom 0.406: SJ1.2 5.08,8.57
  Bottom 0.61: 5.08,8.57 R1.2
N$4
  Top 0.61: DOUT.1 R2.2
  Bottom 0.61: R2.2 SJ2.2
N$5
  Top 0.61: R3.2 C1.1
  Bottom 0.61: SJ3.2 R3.2 | PLC9823.2 11.35,12.14 C1.1
N$6
  Bottom 0.61: SJ4.1 R4.1 6.35,17.27 8.57,17.27 9.84,18.54 9.84,23.54 PLC1.1
N$7
  Bottom 0.61: R5.1 SJ5.1 14.97,22.86 PLC1.4
N$8
  Top 0.61: DIN1.1 R4.2
  Bottom 0.406: SJ4.2 5.08,24.57
  Bottom 0.61: 5.08,24.57 R4.2
N$9
  Top 0.61: DOUT1.1 R5.2
  Bottom 0.61: R5.2 SJ5.2
N$10
  Top 0.61: R6.2 C2.1
  Bottom 0.61: SJ6.2 R6.2 | PLC1.2 11.35,28.14 C2.1
N$11
  Bottom 0.61: SJ7.1 R7.1 6.35,33.27 8.57,33.27 9.84,34.54 9.84,39.54 PLC2.1
N$12
  Bottom 0.61: R8.1 SJ8.1 14.97,38.86 PLC2.4
N$13
  Top 0.61: DIN2.1 R7.2
  Bottom 0.406: SJ7.2 5.08,40.57
  Bottom 0.61: 5.08,40.57 R7.2
N$14
  Top 0.61: DOUT2.1 R8.2
  Bottom 0.61: R8.2 SJ8.2
N$15
  Top 0.61: R9.2 C3.1
  Bottom 0.61: SJ9.2 R9.2 | PLC2.2 11.35,44.14 C3.1
N$16
  Bottom 0.61: SJ10.1 R10.1 6.35,49.27 8.57,49.27 9.84,50.54 9.84,55.54 PLC3.1
N$17
  Bottom 0.61: R11.1 SJ11.1 14.97,54.86 PLC3.4
N$18
  Top 0.61: DIN3.1 R10.2
  Bottom 0.406: SJ10.2 5.08,56.57
  Bottom 0.61: 5.08,56.57 R10.2
N$19
  Top 0.61: DOUT3.1 R11.2
  Bottom 0.61: R11.2 SJ11.2
N$20
  Top 0.61: R12.2 C4.1
  Bottom 0.61: SJ12.2 R12.2 | PLC3.2 11.35,60.14 C4.1
N$21
  Bottom 0.61: SJ13.1 R13.1 6.35,65.27 8.57,65.27 9.84,66.54 9.84,71.54 PLC4.1
N$22
  Bottom 0.61: R14.1 SJ14.1 14.97,70.86 PLC4.4
N$23
  Top 0.61: DIN4.1 R13.2
  Bottom 0.406: SJ13.2 5.08,72.57
  Bottom 0.61: 5.08,72.57 R13.2
N$24
  Top 0.61: DOUT4.1 R14.2
  Bottom 0.61: R14.2 SJ14.2
N$25
  Top 0.61: R15.2 C5.1
  Bottom 0.61: SJ15.2 R15.2 | PLC4.2 11.35,76.14 C5.1
N$26
  Bottom 0.61: SJ16.1 R16.1 29.35,65.27 31.57,65.27 32.84,66.54 32.84,71.54 PLC5.1
N$27
  Bottom 0.61: R17.1 SJ17.1 37.97,70.86 PLC5.4
N$28
  Top 0.61: DIN5.1 R16.2
  Bottom 0.406: SJ16.2 28.08,72.57
  Bottom 0.61: 28.08,72.57 R16.2
N$29
  Top 0.61: DOUT5.1 R17.2
  Bottom 0.61: R17.2 SJ17.2
N$30
  Top 0.61: R18.2 C6.1
  Bottom 0.61: SJ18.2 R18.2 | PLC5.2 34.35,76.14 C6.1
N$31
  Bottom 0.61: SJ19.1 R19.1 29.35,49.27 31.57,49.27 32.84,50.54 32.84,55.54 PLC6.1
N$32
  Bottom 0.61: R20.1 SJ20.1 37.97,54.86 PLC6.4
N$33
  Top 0.61: DIN6.1 R19.2
  Bottom 0.406: SJ19.2 28.08,56.57
  Bottom 0.61: 28.08,56.57 R19.2
N$34
  Top 0.61: DOUT6.1 R20.2
  Bottom 0.61: R20.2 SJ20.2
N$35
  Top 0.61: R21.2 C7.1
  Bottom 0.61: SJ21.2 R21.2 | PLC6.2 34.35,60.14 C7.1
N$36
  Bottom 0.61: SJ22.1 R22.1 29.35,33.27 31.57,33.27 32.84,34.54 32.84,39.54 PLC7.1
N$37
  Bottom 0.61: R23.1 SJ23.1 37.97,38.86 PLC7.4
N$38
  Top 0.61: DIN7.1 R22.2
  Bottom 0.406: SJ22.2 28.08,40.57
  Bottom 0.61: 28.08,40.57 R22.2
N$39
  Top 0.61: DOUT7.1 R23.2
  Bottom 0.61: R23.2 SJ23.2
N$40
  Top 0.61: R24.2 C8.1
  Bottom 0.61: SJ24.2 R24.2 | PLC7.2 34.35,44.14 C8.1
N$41
  Bottom 0.61: SJ25.1 R25.1 29.35,17.27 31.57,17.27 32.84,18.54 32.84,23.54 PLC8.1
N$42
  Bottom 0.61: R26.1 SJ26.1 37.97,22.86 PLC8.4
N$43
  Top 0.61: DIN8.1 R25.2
  Bottom 0.406: SJ25.2 28.08,24.57
  Bottom 0.61: 28.08,24.57 R25.2
N$44
  Top 0.61: DOUT8.1 R26.2
  Bottom 0.61: R26.2 SJ26.2
N$45
  Top 0.61: R27.2 C9.1
  Bottom 0.61: SJ27.2 R27.2 | PLC8.2 34.35,28.14 C9.1
N$46
  Bottom 0.61: SJ28.1 R28.1 29.35,1.27 31.57,1.27 32.84,2.54 32.84,7.54 PLC9.1
N$47
  Bottom 0.61: R29.1 SJ29.1 37.97,6.86 PLC9.4
N$48
  Top 0.61: DIN9.1 R28.2
  Bottom 0.406: SJ28.2 28.08,8.57
  Bottom 0.61: 28.08,8.57 R28.2
N$49
  Top 0.61: DOUT9.1 R29.2
  Bottom 0.61: R29.2 SJ29.2
N$50
  Top 0.61: R30.2 C10.1
  Bottom 0.61: SJ30.2 R30.2 | PLC9.2 34.35,12.14 C10.1
N$51
  Bottom 0.61: SJ31.1 R31.1 52.35,1.27 54.57,1.27 55.84,2.54 55.84,7.54 PLC10.1
N$52
  Bottom 0.61: R32.1 SJ32.1 60.97,6.86 PLC10.4
N$53
  Top 0.61: DIN10.1 R31.2
  Bottom 0.406: SJ31.2 51.08,8.57
  Bottom 0.61: 51.08,8.57 R31.2
N$54
  Top 0.61: DOUT10.1 R32.2
  Bottom 0.61: R32.2 SJ32.2
N$55
  Top 0.61: R33.2 C11.1
  Bottom 0.61: SJ33.2 R33.2 | PLC10.2 57.35,12.14 C11.1
N$56
  Bottom 0.61: SJ34.1 R34.1 52.35,17.27 54.57,17.27 55.84,18.54 55.84,23.54 PLC11.1
N$57
  Bottom 0.61: R35.1 SJ35.1 60.97,22.86 PLC11.4
N$58
  Top 0.61: DIN11.1 R34.2
  Bottom 0.406: SJ34.2 51.08,24.57
  Bottom 0.61: 51.08,24.57 R34.2
N$59
  Top 0.61: DOUT11.1 R35.2
  Bottom 0.61: R35.2 SJ35.2
N$60
  Top 0.61: R36.2 C12.1
  Bottom 0.61: SJ36.2 R36.2 | PLC11.2 57.35,28.14 C12.1
N$61
  Bottom 0.61: SJ37.1 R37.1 52.35,33.27 54.57,33.27 55.84,34.54 55.84,39.54 PLC12.1
N$62
  Bottom 0.61: R38.1 SJ38.1 60.97,38.86 PLC12.4
N$63
  Top 0.61: DIN12.1 R37.2
  Bottom 0.406: SJ37.2 51.08,40.57
  Bottom 0.61: 51.08,40.57 R37.2
N$64
  Top 0.61: DOUT12.1 R38.2
  Bottom 0.61: R38.2 SJ38.2
N$65
  Top 0.61: R39.2 C13.1
  Bottom 0.61: SJ39.2 R39.2 | PLC12.2 57.35,44.14 C13.1
N$66
  Bottom 0.61: SJ40.1 R40.1 52.35,49.27 54.57,49.27 55.84,50.54 55.84,55.54 PLC13.1
N$67
  Bottom 0.61: R41.1 SJ41.1 60.97,54.86 PLC13.4
N$68
  Top 0.61: DIN13.1 R40.2
  Bottom 0.406: SJ40.2 51.08,56.57
  Bottom 0.61: 51.08,56.57 R40.2
N$69
  Top 0.61: DOUT13.1 R41.2
  Bottom 0.61: R41.2 SJ41.2
N$70
  Top 0.61: R42.2 C14.1
  Bottom 0.61: SJ42.2 R42.2 | PLC13.2 57.35,60.14 C14.1
N$71
  Bottom 0.61: SJ43.1 R43.1 52.35,65.27 54.57,65.27 55.84,66.54 55.84,71.54 PLC14.1
N$72
  Bottom 0.61: R44.1 SJ44.1 60.97,70.86 PLC14.4
N$73
  Top 0.61: DIN14.1 R43.2
  Bottom 0.406: SJ43.2 51.08,72.57
  Bottom 0.61: 51.08,72.57 R43.2
N$74
  Top 0.61: DOUT14.1 R44.2
  Bottom 0.61: R44.2 SJ44.2
N$75
  Top 0.61: R45.2 C15.1
  Bottom 0.61: SJ45.2 R45.2 | PLC14.2 57.35,76.14 C15.1
N$76
  Bottom 0.61: SJ46.1 R46.1 75.35,1.27 77.57,1.27 78.84,2.54 78.84,7.54 PLC15.1
N$77
  Bottom 0.61: R47.1 SJ47.1 83.97,6.86 PLC15.4
N$78
  Top 0.61: DIN15.1 R46.2
  Bottom 0.406: SJ46.2 74.08,8.57
  Bottom 0.61: 74.08,8.57 R46.2
N$79
  Top 0.61: DOUT15.1 R47.2
  Bottom 0.61: R47.2 SJ47.2
N$80
  Top 0.61: R48.2 C16.1
  Bottom 0.61: SJ48.2 R48.2 | PLC15.2 80.35,12.14 C16.1
N$81
  Bottom 0.61: SJ49.1 R49.1 75.35,17.27 77.57,17.27 78.84,18.54 78.84,23.54 PLC16.1
N$82
  Bottom 0.61: R50.1 SJ50.1 83.97,22.86 PLC16.4
N$83
  Top 0.61: DIN16.1 R49.2
  Bottom 0.406: SJ49.2 74.08,24.57
  Bottom 0.61: 74.08,24.57 R49.2
N$84
  Top 0.61: DOUT16.1 R50.2
  Bottom 0.61: R50.2 SJ50.2
N$85
  Top 0.61: R51.2 C17.1
  Bottom 0.61: SJ51.2 R51.2 | PLC16.2 80.35,28.14 C17.1
N$86
  Bottom 0.61: SJ52.1 R52.1 75.35,33.27 77.57,33.27 78.84,34.54 78.84,39.54 PLC17.1
N$87
  Bottom 0.61: R53.1 SJ53.1 83.97,38.86 PLC17.4
N$88
  Top 0.61: DIN17.1 R52.2
  Bottom 0.406: SJ52.2 74.08,40.57
  Bottom 0.61: 74.08,40.57 R52.2
N$89
  Top 0.61: DOUT17.1 R53.2
  Bottom 0.61: R53.2 SJ53.2
N$90
  Top 0.61: R54.2 C18.1
  Bottom 0.61: SJ54.2 R54.2 | PLC17.2 80.35,44.14 C18.1
N$91
  Bottom 0.61: SJ55.1 R55.1 75.35,49.27 77.57,49.27 78.84,50.54 78.84,55.54 PLC18.1
N$92
  Bottom 0.61: R56.1 SJ56.1 83.97,54.86 PLC18.4
N$93
  Top 0.61: DIN18.1 R55.2
  Bottom 0.406: SJ55.2 74.08,56.57
  Bottom 0.61: 74.08,56.57 R55.2
N$94
  Top 0.61: DOUT18.1 R56.2
  Bottom 0.61: R56.2 SJ56.2
N$95
  Top 0.61: R57.2 C19.1
  Bottom 0.61: SJ57.2 R57.2 | PLC18.2 80.35,60.14 C19.1
N$96
  Bottom 0.61: SJ58.1 R58.1 75.35,65.27 77.57,65.27 78.84,66.54 78.84,71.54 PLC19.1
N$97
  Bottom 0.61: R59.1 SJ59.1 83.97,70.86 PLC19.4
N$98
  Top 0.61: DIN19.1 R58.2
  Bottom 0.406: SJ58.2 74.08,72.57
  Bottom 0.61: 74.08,72.57 R58.2
N$99
  Top 0.61: DOUT19.1 R59.2
  Bottom 0.61: R59.2 SJ59.2
N$100
  Top 0.61: R60.2 C20.1
  Bottom 0.61: SJ60.2 R60.2 | PLC19.2 80.35,76.14 C20.1
VCC
  Top 0.61: 7.62,4.76 R3.1
  Top 2.54: VCC2.1 16.51,5.71 15.56,4.76 7.62,4.76 6.03,4.76 5.08,5.71 VCC1.1
  Bottom 0.61: SJ3.1 R3.1
VCC1
  Top 0.61: 7.62,20.76 R6.1
  Top 2.54: VCC4.1 16.51,21.71 15.56,20.76 7.62,20.76 6.03,20.76 5.08,21.71 VCC3.1
  Bottom 0.61: SJ6.1 R6.1
VCC2
  Top 0.61: 7.62,36.76 R9.1
  Top 2.54: VCC6.1 16.51,37.72 15.56,36.76 7.62,36.76 6.03,36.76 5.08,37.72 VCC5.1
  Bottom 0.61: SJ9.1 R9.1
VCC3
  Top 0.61: 7.62,52.76 R12.1
  Top 2.54: VCC8.1 16.51,53.72 15.56,52.76 7.62,52.76 6.03,52.76 5.08,53.72 VCC7.1
  Bottom 0.61: SJ12.1 R12.1
VCC4
  Top 0.61: 7.62,68.76 R15.1
  Top 2.54: VCC10.1 16.51,69.72 15.56,68.76 7.62,68.76 6.03,68.76 5.08,69.72 VCC9.1
  Bottom 0.61: SJ15.1 R15.1
VCC5
  Top 0.61: 30.62,68.76 R18.1
  Top 2.54: VCC12.1 39.51,69.72 38.56,68.76 30.62,68.76 29.03,68.76 28.08,69.72 VCC11.1
  Bottom 0.61: SJ18.1 R18.1
VCC6
  Top 0.61: 30.62,52.76 R21.1
  Top 2.54: VCC14.1 39.51,53.72 38.56,52.76 30.62,52.76 29.03,52.76 28.08,53.72 VCC13.1
  Bottom 0.61: SJ21.1 R21.1
VCC7
  Top 0.61: 30.62,36.76 R24.1
  Top 2.54: VCC16.1 39.51,37.72 38.56,36.76 30.62,36.76 29.03,36.76 28.08,37.72 VCC15.1
  Bottom 0.61: SJ24.1 R24.1
VCC8
  Top 0.61: 30.62,20.76 R27.1
  Top 2.54: VCC18.1 39.51,21.71 38.56,20.76 30.62,20.76 29.03,20.76 28.08,21.71 VCC17.1
  Bottom 0.61: SJ27.1 R27.1
VCC9
  Top 0.61: 30.62,4.76 R30.1
  Top 2.54: VCC20.1 39.51,5.71 38.56,4.76 30.62,4.76 29.03,4.76 28.08,5.71 VCC19.1
  Bottom 0.61: SJ30.1 R30.1
VCC10
  Top 0.61: 53.62,4.76 R33.1
  Top 2.54: VCC22.1 62.51,5.71 61.56,4.76 53.62,4.76 52.03,4.76 51.08,5.71 VCC21.1
  Bottom 0.61: SJ33.1 R33.1
VCC11
  Top 0.61: 53.62,20.76 R36.1
  Top 2.54: VCC24.1 62.51,21.71 61.56,20.76 53.62,20.76 52.03,20.76 51.08,21.71 VCC23.1
  Bottom 0.61: SJ36.1 R36.1
VCC12
  Top 0.61: 53.62,36.76 R39.1
  Top 2.54: VCC26.1 62.51,37.72 61.56,36.76 53.62,36.76 52.03,36.76 51.08,37.72 VCC25.1
  Bottom 0.61: SJ39.1 R39.1
VCC13
  Top 0.61: 53.62,52.76 R42.1
  Top 2.54: VCC28.1 62.51,53.72 61.56,52.76 53.62,52.76 52.03,52.76 51.08,53.72 VCC27.1
  Bottom 0.61: SJ42.1 R42.1
VCC14
  Top 0.61: 53.62,68.76 R45.1
  Top 2.54: VCC30.1 62.51,69.72 61.56,68.76 53.62,68.76 52.03,68.76 51.08,69.72 VCC29.1
  Bottom 0.61: SJ45.1 R45.1
VCC15
  Top 0.61: 76.62,4.76 R48.1
  Top 2.54: VCC32.1 85.51,5.71 84.56,4.76 76.62,4.76 75.03,4.76 74.08,5.71 VCC31.1
  Bottom 0.61: SJ48.1 R48.1
VCC16
  Top 0.61: 76.62,20.76 R51.1
  Top 2.54: VCC34.1 85.51,21.71 84.56,20.76 76.62,20.76 75.03,20.76 74.08,21.71 VCC33.1
  Bottom 0.61: SJ51.1 R51.1
VCC17
  Top 0.61: 76.62,36.76 R54.1
  Top 2.54: VCC36.1 85.51,37.72 84.56,36.76 76.62,36.76 75.03,36.76 74.08,37.72 VCC35.1
  Bottom 0.61: SJ54.1 R54.1
VCC18
  Top 0.61: 76.62,52.76 R57.1
  Top 2.54: VCC38.1 85.51,53.72 84.56,52.76 76.62,52.76 75.03,52.76 74.08,53.72 VCC37.1
  Bottom 0.61: SJ57.1 R57.1
VCC19
  Top 0.61: 76.62,68.76 R60.1
  Top 2.54: VCC40.1 85.51,69.72 84.56,68.76 76.62,68.76 75.03,68.76 74.08,69.72 VCC39.1
  Bottom 0.61: SJ60.1 R60.1

## Text on the board
bPlace: DIN | VCC | GND | DOUT | DIN | VCC | GND | DOUT | DIN | VCC | GND | DOUT | DIN | VCC | GND | DOUT | DIN | VCC | GND | DOUT | DIN | VCC | GND | DOUT | DIN | VCC | GND | DOUT | DIN | VCC | GND | DOUT | DIN | VCC | GND | DOUT | DIN | VCC | GND | DOUT | DIN | VCC | GND | DOUT | DIN | VCC | GND | DOUT | DIN | VCC | GND | DOUT | DIN | VCC | GND | DOUT | DIN | VCC | GND | DOUT | DIN | VCC | GND | DOUT | DIN | VCC | GND | DOUT | DIN | VCC | GND | DOUT | DIN | VCC | GND | DOUT | DIN | VCC | GND | DOUT
_tNames: DIN | DOUT | DIN | DOUT | DIN | DOUT | DIN | DOUT | GND1 | GND2 | GND1 | GND2 | GND1 | GND2 | GND1 | GND2 | VCC1 | VCC2 | VCC1 | VCC2 | VCC1 | VCC2 | VCC1 | VCC2 | DIN | DOUT | DIN | DOUT | DIN | DOUT | DIN | DOUT | GND1 | GND2 | GND1 | GND2 | GND1 | GND2 | GND1 | GND2 | VCC1 | VCC2 | VCC1 | VCC2 | VCC1 | VCC2 | VCC1 | VCC2 | DIN | DOUT | DIN | DOUT | DIN | DOUT | DIN | DOUT | GND1 | GND2 | GND1 | GND2 | GND1 | GND2 | GND1 | GND2 | VCC1 | VCC2 | VCC1 | VCC2 | VCC1 | VCC2 | VCC1 | VCC2 | DIN | DOUT | DIN | DOUT | DIN | DOUT | DIN | DOUT | GND1 | GND2 | GND1 | GND2 | GND1 | GND2 | GND1 | GND2 | VCC1 | VCC2 | VCC1 | VCC2 | VCC1 | VCC2 | VCC1 | VCC2 | DIN | DOUT | DIN | DOUT | DIN | DOUT | DIN | DOUT | GND1 | GND2 | GND1 | GND2 | GND1 | GND2 | GND1 | GND2 | VCC1 | VCC2 | VCC1 | VCC2 | VCC1 | VCC2 | VCC1 | VCC2